# Altium PCB Pulser Driver.PcbDoc (part 1 of 3)
Units mil, origin at the board's own origin, x right, y up, seen from the top; angles counter-clockwise.
Board outline 1200 x 10020 mil, 6 copper layers (TopLayer, Ground, MidLayer1, MidLayer2, Power, BottomLayer); 260 components, 152 nets, 836 pads, 245 vias.
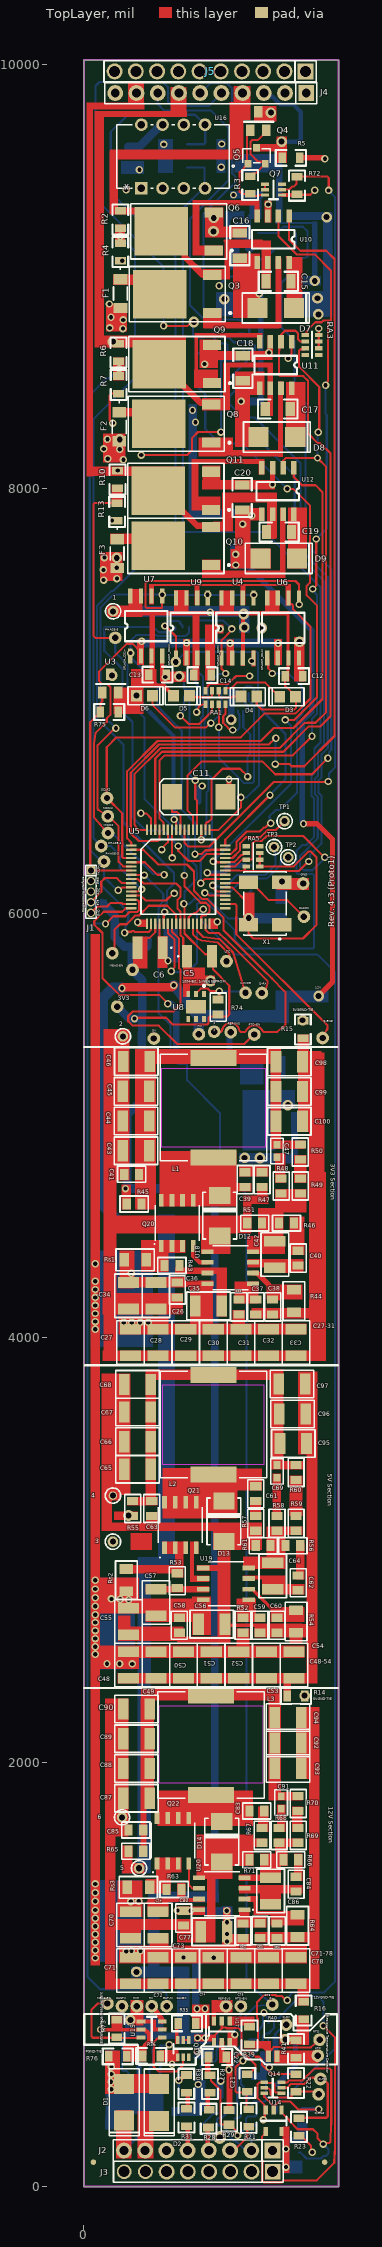
[diagram p0: TopLayer view]
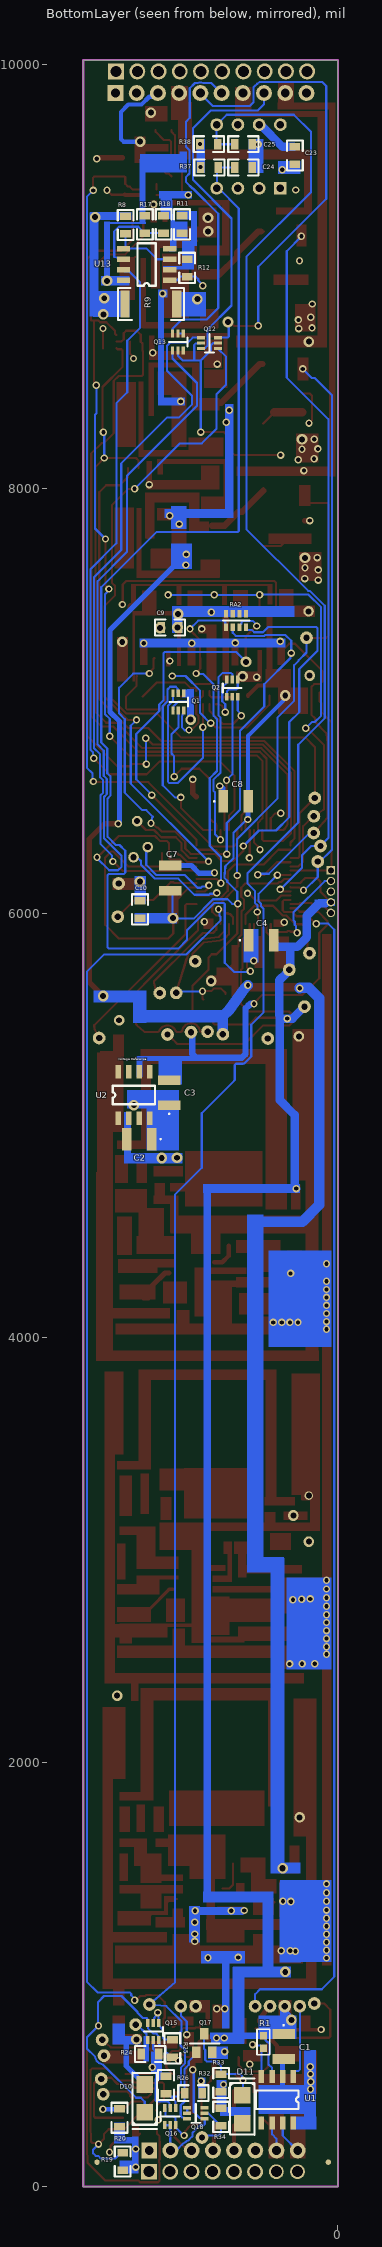
[diagram p1: BottomLayer view, seen from below]
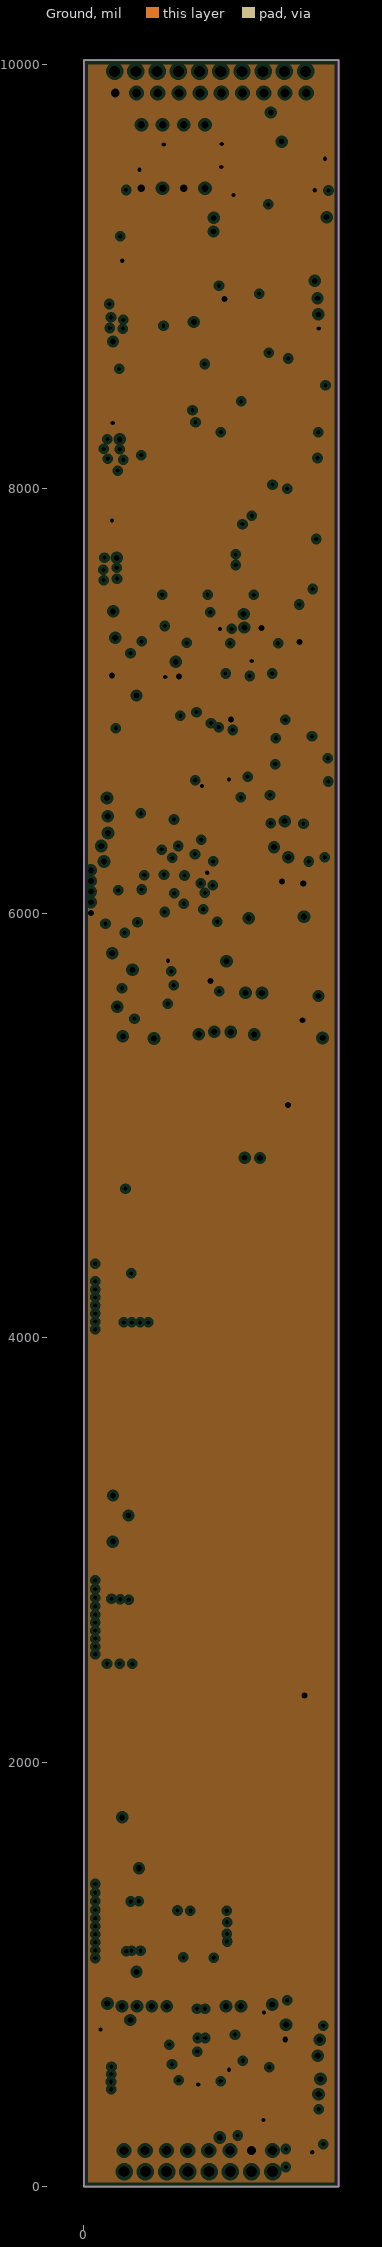
[diagram p2: Ground, clearances drawn from the general rule]
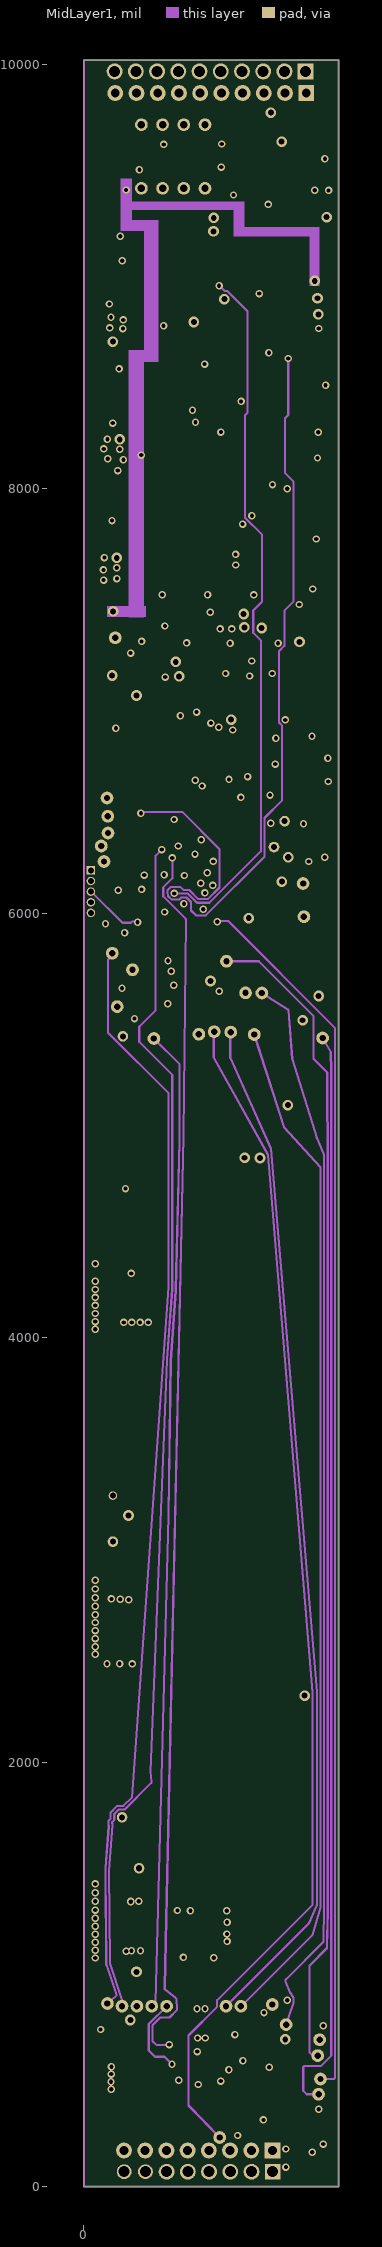
[diagram p3: MidLayer1]
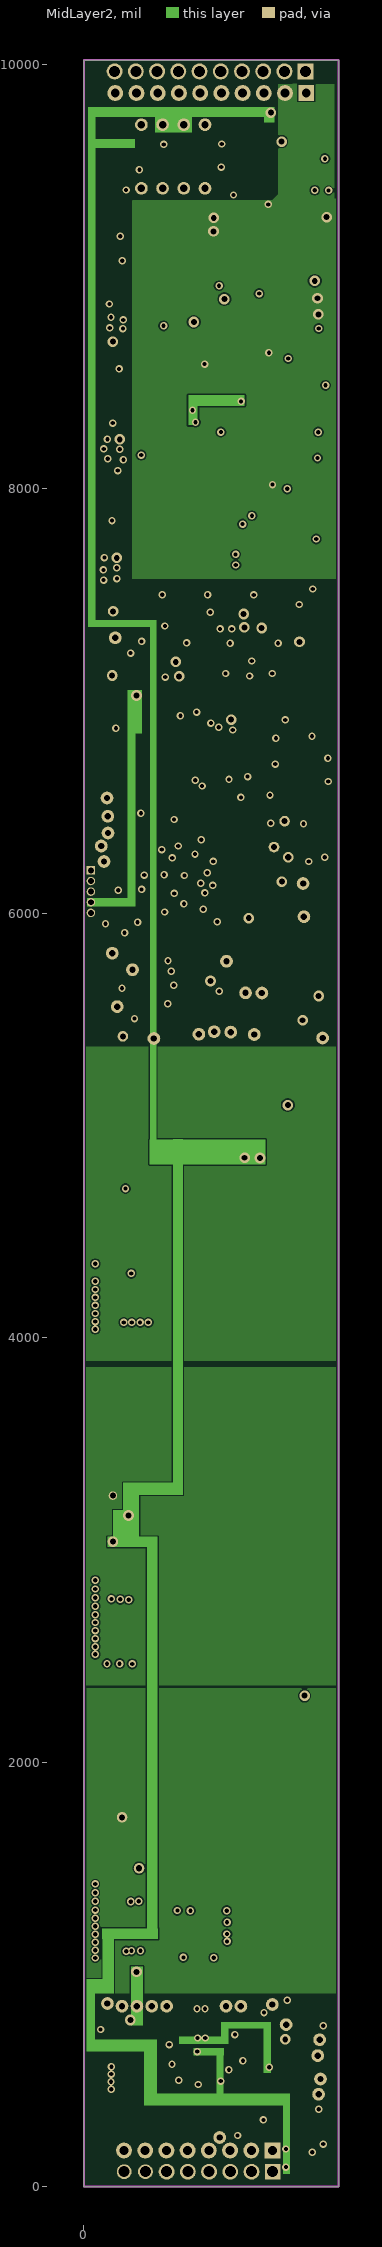
[diagram p4: MidLayer2]
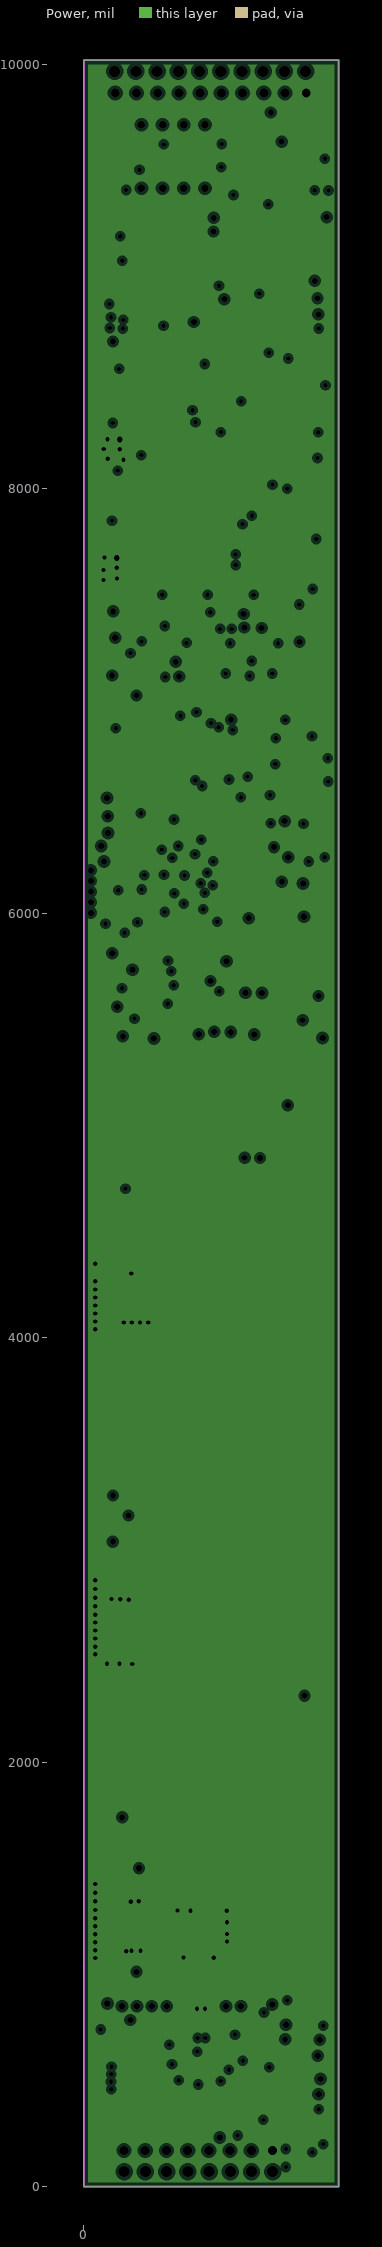
[diagram p5: Power, clearances drawn from the general rule]

## Layer stack, top to bottom
TopSolder: solder mask 0.4, Solder Resist, Dk 3.5
TopLayer: signal copper 1.4
Dielectric1: core 12.6, FR-4, Dk 4.8
Ground: plane copper 1.4, net GND
Dielectric5: prepreg 12.6, FR-4, Dk 4.8
MidLayer1: signal copper 1.4
Dielectric2: core 12.6, FR-4, Dk 4.8
MidLayer2: signal copper 1.4
Dielectric3: prepreg 12.6, FR-4, Dk 4.8
Power: plane copper 1.4, net HV
Dielectric4: core 12.6, FR-4, Dk 4.8
BottomLayer: signal copper 1.4
BottomSolder: solder mask 0.4, Solder Resist, Dk 3.5

## Board outline
0,0 1200,0 1200,10020 0,10020

## Design rules (kind name [scope] priority, off if disabled: settings)
Clearance "Mid2 Layer Clearance" [InNamedPolygon('Mid2 - Blank')] p1: gap=8 ignorepadtopadclearanceinfootprint=FALSE except(0: Arc-Hole Track-Hole SMDPad-Hole THPad-Hole Via-Hole Fill-Hole Poly-Hole Region-Hole Text-Hole)
Clearance "Mid 1 Layer Clearance" [InNamedPolygon('Mid1 - Blank')] p2: gap=8 ignorepadtopadclearanceinfootprint=FALSE except(0: Arc-Hole Track-Hole SMDPad-Hole THPad-Hole Via-Hole Fill-Hole Poly-Hole Region-Hole Text-Hole)
Clearance [All] p3: gap=7 ignorepadtopadclearanceinfootprint=FALSE except(0: Arc-Hole Track-Hole SMDPad-Hole THPad-Hole Via-Hole Fill-Hole Poly-Hole Region-Hole Text-Hole)
FabricationTestPointUsage TestPointUsage [All] p1: valid=0 allowmultiple=FALSE
FabricationTestpoint Testpoint [All] p1: side=3 testpointundercomponent=TRUE minsize=40 maxsize=100 preferedsize=60 minholesize=20 maxholesize=40 preferedholesize=32 testpointgrid=1 allowsidetop=TRUE allowsidebottom=TRUE usegrid=TRUE gridtolerance=0.01
MinimumAnnularRing [All] p1: minimumring=5
MinimumSolderMaskSliver [IsVia] p1: minsoldermaskwidth=5
PlaneClearance [All] p1: clearance=15
PlaneConnect [All] p1: planeconnectstyle=Direct reliefexpansion=20 reliefentries=4 reliefconductorwidth=10 reliefairgap=10
PolygonConnect [All] p1: connectstyle=Direct reliefconductorwidth=10 reliefentries=4 polygonreliefangle="90 Angle" airgapwidth=10
RoutingLayers [All] p1: top layer_v5=TRUE mid layer 1_v5=FALSE mid layer 2_v5=FALSE bottom layer_v5=TRUE
RoutingVias [All] p1: holewidth=20 width=35 viastyle="Through Hole" minholewidth=20 minwidth=35 maxholewidth=28 maxwidth=50
SilkToSolderMaskClearance SilkscreenOverComponentPads [IsPad] p1: minsilkscreentomaskgap=10 clearancetoexposedcopper=TRUE
SolderMaskExpansion [All] p1: expansion=4 istentingtop=FALSE
Width [All] p1: maxlimit=100 minlimit=7 preferedwidth=10
23 further rules are at their usual default settings.

## Classes and differential pairs
component class "U_Power Supply 5V": 3 4 C48 C49 C50 C51 C52 C53 C54 C55 C56 C57 C58 C59 C60 C61 C62 C63 C64 C65 C66 C67 C68 C69 C95 C96 C97 D13 L2 Q21 R52 R53 R54 R55 R56 R57 R58 R59 R60 R61 Rs2 U19
component class "U_Power Supply 3.3V": 1 2 C26 C27 C28 C29 C30 C31 C32 C33 C34 C35 C36 C37 C38 C39 C40 C41 C42 C43 C44 C45 C46 C47 C98 C99 C100 D12 L1 Q20 R14 R15 R16 R42 R43 R44 R45 R46 R47 R48 R49 R50 R51 R76 Rs1 U18
component class "U_Power Supply 12V": 5 6 C70 C71 C72 C73 C74 C75 C76 C77 C78 C79 C80 C81 C82 C83 C84 C85 C86 C87 C88 C89 C90 C91 C92 C93 C94 D14 L3 Q22 R62 R63 R64 R65 R66 R67 R68 R69 R70 R71 Rs3 U20

## Components (designator, comment, footprint, x,y, rotation, side; value= is the part's Value field where it differs from the comment)
1 "5VOUT" TP-S#1 138,7423 r90 top
2 "3V3GND" TP-S#1 184,5420 r90 top
3 "5VOUT" TP-S#1 137,3039 r90 top
4 "5VGND" TP-S#2 137,3256 r90 top
5 "12VOUT" TP-S#1 260,1500 r90 top
6 "12GND" TP-S#1 180,1740 r90 top
C1 "C1210_0.1uF_100V_210C" C1210 256,660 r270 bottom
C2 "C1210_0.1uF_100V_210C" C1210 936.06,4936 r0 bottom
C3 "C1210_0.1uF_100V_210C" C1210 795,5155 r90 bottom
C4 "C1210_0.1uF_100V_210C" C1210 361,5873 r180 bottom
C5 "C1210_0.1uF_100V_210C" C1210 545,5797 r0 top
C6 "C1210_0.1uF_100V_210C" C1210 312,5838 r180 top
C7 "C1210_0.1uF_100V_210C" C1210 789,6165.94 r270 bottom
C8 "C1210_0.1uF_100V_210C" C1210 482,6527 r180 bottom
C9 "0.1uF/50V" 0805-CR#1 833,7346 r180 bottom
C10 "0.1uF/50V" 0805-CR#1 933,6060 r270 bottom
C11 "T2917 100uF/16V +200C" 7343-TANT 416,6549 r0 top
C12 "0.1uF/50V" 0805-CR#1 1031,7117 r180 top
C13 "0.1uF/50V" 0805-CR#1 389,7124 r180 top
C14 "0.1uF/50V" 0805-CR#1 601,7122 r180 top
C15 "1uF/50V" 1206-CR 858,8978 r0 top
C16 "1uF/50V" 1206-CR 735,9205.11 r270 top
C17 "1uF/50V" 1206-CR 854.89,8376 r0 top
C18 "1uF/50V" 1206-CR 749,8627.11 r270 top
C19 "1uF/50V" 1206-CR 860.89,7796 r0 top
C20 "1uF/50V" 1206-CR 746,8018 r270 top
C21 "1uF/50V" 0805-CR#1 770,530 r270 top
C22 "0.1uF/50V" 0805-CR#1 587.32,610 r0 top
C23 "0.1uF/50V" 0805-CR#1 203,9529.32 r90 bottom
C24 "10nF/50V" 0805-CR#1 404.32,9514 r0 bottom
C25 "10nF/50V" 0805-CR#1 404.32,9624 r0 bottom
C26 "GCM32EL8EH106KA07K" 1210 339.99,4135.27 r90 top value="10uF 1210 50V 150C"
C27 "GCM32EL8EH106KA07K" 1210 219.99,3915.27 r90 top value="10uF 1210 50V 150C"
C28 "GCM32EL8EH106KA07K" 1210 349.99,3915.27 r90 top value="10uF 1210 50V 150C"
C29 "GCM32EL8EH106KA07K" 1210 479.99,3915.27 r90 top value="10uF 1210 50V 150C"
C30 "GCM32EL8EH106KA07K" 1210 609.99,3915.27 r90 top value="10uF 1210 50V 150C"
C31 "GCM32EL8EH106KA07K" 1210 739.99,3915.27 r90 top value="10uF 1210 50V 150C"
C32 "GCM32EL8EH106KA07K" 1210 869.99,3915.27 r90 top value="10uF 1210 50V 150C"
C33 "GCM32EL8EH106KA07K" 1210 999.99,3915.27 r90 top value="10uF 1210 50V 150C"
C34 "C1206H104J3GACTU" 1210 209.99,4135.27 r90 top value="2.2uF 1210 175C"
C35 "C1206H104J3GACTU" 1210 525.27,4150.01 r0 top value="470pF 50V 0805 200C"
C36 "0805D121J251KHT" 0805 440,4260 r270 top value="0.1uF 50V 1210 200C"
C37 "C0805H471J1GACTU" 0805 810,4110 r90 top value=CC_0805_470p_200°C
C38 "C0805C272K5HACTU" 0805 890,4110 r90 top value="2.2uF 0805"
C39 "C0805H680J3GACTU" 0805 760,4780 r270 top value=R0805_68pF_25V_200C
C40 "C0805H472J1GACT500" 0805 1010,4410 r270 top value=CC_0805_4700p_200°C
C41 "0805D121J251KHT" 0805 260,4770 r180 top value=100u
C42 "C1206H104J3GACTU" 1210 900.01,4454.73 r270 top value=CC_0805_33pF_200C
C43 "GCM32EL8EH106KA07K" 1210 184,4881 r0 top value="10uF 1210 50V 150C"
C44 "GCM32EL8EH106KA07K" 1210 184,5021 r0 top value="10uF 1210 50V 150C"
C45 "GCM32EL8EH106KA07K" 1210 184,5161 r0 top value="10uF 1210 50V 150C"
C46 "GCM32EL8EH106KA07K" 1210 185,5302 r0 top value="10uF 1210 50V 150C"
C47 "C1206H104J3GACTU" 0603 910,4910 r270 top value=CC_0603_2700pF_200°C
C48 "GCM32EL8EH106KA07K" 1210 209.99,2395.27 r90 top value="10uF 1210 50V 150C"
C49 "GCM32EL8EH106KA07K" 1210 339.99,2395.27 r90 top value="10uF 1210 50V 150C"
C50 "GCM32EL8EH106KA07K" 1210 469.99,2395.27 r90 top value="10uF 1210 50V 150C"
C51 "GCM32EL8EH106KA07K" 1210 599.99,2395.27 r90 top value="10uF 1210 50V 150C"
C52 "GCM32EL8EH106KA07K" 1210 729.99,2395.27 r90 top value="10uF 1210 50V 150C"
C53 "GCM32EL8EH106KA07K" 1210 859.99,2395.27 r90 top value="10uF 1210 50V 150C"
C54 "GCM32EL8EH106KA07K" 1210 989.99,2395.27 r90 top value="10uF 1210 50V 150C"
C55 "GCM32EL8EH106KA07K" 1210 210,2600 r90 top value="10uF 1210 50V 150C"
C56 "C1206H104J3GACTU" 1210 664.73,2649.99 r180 top value="2.2uF 1210 175C"
C57 "C1206H104J3GACTU" 1210 340,2690 r90 top value="470pF 50V 0805 200C"
C58 "0805D121J251KHT" 0805 450,2680 r270 top value="0.1uF 50V 1210 200C"
C59 "C0805H471J1GACTU" 0805 830,2610 r90 top value=CC_0805_470p_200°C
C60 "C0805C272K5HACTU" 0805 910,2610 r90 top value="0.47uF 0805"
C61 "C0805H680J3GACTU" 0805 810,3230 r90 top value=R0805_68pF_25V_200C
C62 "C0805H472J1GACT500" 0805 1010,2880 r270 top value=CC_0805_4700p_200°C
C63 "0805D121J251KHT" 0805 320,3230 r270 top value=100u
C64 "C1206H104J3GACTU" 1210 890,2940 r270 top value=CC_0805_33pF_200C
C65 "GCM32EL8EH106KA07K" 1210 190,3380 r0 top value="10uF 1210 50V 150C"
C66 "GCM32EL8EH106KA07K" 1210 190,3510 r0 top value="10uF 1210 50V 150C"
C67 "GCM32EL8EH106KA07K" 1210 190,3650 r0 top value="10uF 1210 50V 150C"
C68 "GCM32EL8EH106KA07K" 1210 190,3780 r0 top value="10uF 1210 50V 150C"
C69 "C1206H104J3GACTU" 0603 910,3400 r270 top value=CC_0603_2700pF_200°C
C70 "GCM32EL8EH106KA07K" 1210 220,1170 r90 top value="10uF 1210 50V 150C"
C71 "GCM32EL8EH106KA07K" 1210 219.99,955.27 r90 top value="10uF 1210 50V 150C"
C72 "GCM32EL8EH106KA07K" 1210 349.99,955.27 r90 top value="10uF 1210 50V 150C"
C73 "GCM32EL8EH106KA07K" 1210 479.99,955.27 r90 top value="10uF 1210 50V 150C"
C74 "GCM32EL8EH106KA07K" 1210 609.99,955.27 r90 top value="10uF 1210 50V 150C"
C75 "GCM32EL8EH106KA07K" 1210 739.99,955.27 r90 top value="10uF 1210 50V 150C"
C76 "GCM32EL8EH106KA07K" 1210 869.99,955.27 r90 top value="10uF 1210 50V 150C"
C77 "GCM32EL8EH106KA07K" 1210 550.27,1201.01 r0 top value="10uF 1210 50V 150C"
C78 "C1206H104J3GACTU" 1210 999.99,955.27 r90 top value="2.2uF 1210 175C"
C79 "C1206H104J3GACTU" 1210 350,1170 r90 top value="470pF 50V 0805 200C"
C80 "0805D121J251KHT" 0805 470,1300 r270 top value="0.1uF 50V 1210 200C"
C81 "C0805H471J1GACTU" 0805 831,1171 r90 top value=CC_0805_470p_200°C
C82 "C0805C272K5HACTU" 0805 911,1170 r90 top value="0.47uF 0805"
C83 "C0805H680J3GACTU" 0805 850,1770 r180 top value=R0805_68pF_25V_200C
C84 "C0805H472J1GACT500" 0805 1000,1460 r270 top value=CC_0805_4700p_200°C
C85 "0805D121J251KHT" 0805 280,1680 r180 top value=100u
C86 "C1206H104J3GACTU" 1210 880.01,1454.73 r270 top value=CC_0805_33pF_200C
C87 "GCM32EL8EH106KA07K" 1210 185.27,1830.01 r0 top value="10uF 1210 50V 150C"
C88 "GCM32EL8EH106KA07K" 1210 185.27,1970.01 r0 top value="10uF 1210 50V 150C"
C89 "GCM32EL8EH106KA07K" 1210 185.27,2110.01 r0 top value="10uF 1210 50V 150C"
C90 "GCM32EL8EH106KA07K" 1210 185.27,2250.01 r0 top value="10uF 1210 50V 150C"
C91 "C1206H104J3GACTU" 0603 930,1840 r270 top
C92 "GCM32EL8EH106KA07K" 1210 1024.73,2089.99 r180 top value="10uF 1210 50V 150C"
C93 "GCM32EL8EH106KA07K" 1210 1024.73,1969.99 r180 top value="10uF 1210 50V 150C"
C94 "GCM32EL8EH106KA07K" 1210 1024.73,2209.99 r180 top value="10uF 1210 50V 150C"
C95 "GCM32EL8EH106KA07K" 1210 1049,3501 r180 top value="10uF 1210 50V 150C"
C96 "GCM32EL8EH106KA07K" 1210 1045,3640 r180 top value="10uF 1210 50V 150C"
C97 "GCM32EL8EH106KA07K" 1210 1043,3782 r180 top value="10uF 1210 50V 150C"
C98 "GCM32EL8EH106KA07K" 1210 1030,5300 r180 top value="10uF 1210 50V 150C"
C99 "GCM32EL8EH106KA07K" 1210 1030,5160 r180 top value="10uF 1210 50V 150C"
C100 "GCM32EL8EH106KA07K" 1210 1030,5020 r180 top value="10uF 1210 50V 150C"
D1 "MURS120-13-F" SMB-D 190,484 r270 top
D2 "MURS120-13-F" SMB-D 355,483 r270 top
D3 "LTST-C170KGKT" 0805-D 997.8,7020 r180 top
D4 "LTST-C170KGKT" 0805-D 814.8,7021 r180 top
D5 "LTST-C170KGKT" 0805-D 423.2,7025 r0 top
D6 "LTST-C170KGKT" 0805-D 248.2,7025 r0 top
D7 "MURS120-13-F" SMB-D 818,8852 r0 top
D8 "MURS120-13-F" SMB-D 823,8244 r0 top
D9 "MURS120-13-F" SMB-D 831.77,7672 r0 top
D10 "SMAZ5V6" SMA 967.48,506.3 r270 bottom
D11 "DNP" SMA 392.52,273.7 r90 bottom
D12 "STPS2H100UY" SMB 640,4480 r270 top value=100V-2A
D13 "STPS2H100UY" SMB 660,3040 r270 top value=100V-2A
D14 "STPS2H100UY" SMB 650,1530 r270 top value=100V-2A
F1 "SF-1206HH3000R-2" SF1206HH3000R2#1 172,8920 r270 top
F2 "SF-1206HH3000R-2" SF1206HH3000R2#2 167,8292 r270 top
F3 "SF-1206HH3000R-2" SF1206HH3000R2#2 157,7695 r270 top
J1 "ICSP" "HDR1x5 - 0.050\"" 33,6202 r270 top
J2 "Interface" HDR1X8#1 889,170 r180 top
J3 "Strain Relief" HDR1X8#2 890,70 r180 top
J4 "Motor" HDR1X10#1 1048,9865 r180 top
J5 "Strain Relief" HDR1X10#2 1045,9967 r180 top
L1 "DRA125-470-R" IND_CB_DRA125 610,5083.75 r90 top value=33u-2.59A
L2 "DRA125-470-R" IND_CB_DRA125 610,3590 r90 top value=33u-2.59A
L3 "DRA125-470-R" IND_CB_DRA125 600,2080 r90 top value=33u-2.59A
Q1 "2N7002DW" DCK-6 725.82,7036.71 r270 bottom
Q2 "2N7002DW" DCK-6 523.05,7020.29 r90 bottom
Q3 "IPD90N06S4L03ATMA2" TO228P998X235-3N-2-V 481.02,8918 r180 top
Q4 "ZXMP6A13F" DGS 784,9690 r0 top
Q5 "ZXMP6A13F" SOT-23_DIO 814,9570 r0 top
Q6 "IPD90N06S4L03ATMA2" TO228P998X235-3N-2-V 487.98,9212.76 r180 top
Q7 "2N7002DW" DCK-6 934.71,9384.41 r180 top
Q8 "IPD90N06S4L03ATMA2" TO228P998X235-3N-2-V 477.02,8307 r180 top
Q9 "IPD90N06S4L03ATMA2" TO228P998X235-3N-2-V 480,8588 r180 top
Q10 "IPD90N06S4L03ATMA2" TO228P998X235-3N-2-V 474.98,7730.76 r180 top
Q11 "IPD90N06S4L03ATMA2" TO228P998X235-3N-2-V 474.98,7990.76 r180 top
Q12 "2N7002DW" DCK-6 565.29,8661.41 r0 bottom
Q13 "2N7002DW" DCK-6 728,8731.71 r270 bottom
Q14 "2N7002DW" DCK-6 930.71,440 r180 top
Q15 "2N7002DW" DCK-6 844.41,770.71 r270 bottom
Q16 "2N7002DW" DCK-6 815.59,289.29 r90 bottom
Q17 "ZXMP6A13F" DGS 667.4,633.39 r180 bottom
Q18 "2N7002DW" DCK-6 629.29,320 r0 bottom
Q19 "2N7002DW" DCK-6 442.41,609.29 r90 top
Q20 "NDS9407" SOIC_S9407_ONS 440,4540 r270 top value=60V-3A
Q21 "NDS9407" SOIC_S9407_ONS 455,3117.25 r270 top value=60V-3A
Q22 "NDS9407" SOIC_S9407_ONS 420,1630 r270 top value=60V-3A
R1 "3K32" 0603 351,651 r90 bottom
R2 "10K" 0805-CR#1 172,9309.68 r270 top
R3 "100K" 0805-CR#1 784,9390 r90 top
R4 "1K" 0805-CR#1 172,9074.32 r90 top
R5 "100K" 0805-CR#1 934,9560 r0 top
R6 "10K" 0805-CR#1 163,8684 r270 top
R7 "1K" 0805-CR#1 164,8449 r90 top
R8 "1K" 0805-CR#1 1000,9284.68 r270 bottom
R9 "0R1 (1W)" 2512-CR 759,8871 r0 bottom
R10 "10K" 0805-CR#1 158,8085.68 r270 top
R11 "10K" 0805-CR#1 735,9205 r90 bottom
R12 "100K" 0805-CR#1 710,9082.68 r270 bottom
R13 "1K" 0805-CR#1 157,7850.32 r90 top
R14 "R0805 0R" 0805-CR#1 957.32,2312 r0 top
R15 "R0805 0R" 0805-CR#1 1032,5411 r90 top
R16 "R0805 0R" 0805-CR#1 1036,870.68 r270 top
R17 "100K" 0805-CR#1 910,9205 r90 bottom
R18 "10K" 0805-CR#1 821,9205 r90 bottom
R19 "10K" 0805-CR#1 1013.87,77.32 r90 bottom
R20 "10K" 0805-CR#2 1029,283 r90 bottom
R21 "1K" 0805-CR#1 777,365 r270 top
R22 "10K" 0805-CR#1 1000,530 r270 top
R23 "10K" 0805-CR#1 1014,323 r270 top
R24 "100K" 0805-CR#1 925.68,625 r180 bottom
R25 "10K" 0805-CR#1 780,610 r90 bottom
R26 "10K" 0805-CR#1 810,520 r270 bottom
R27 "1K" 0805-CR#1 595,525 r270 top
R28 "1K" 0805-CR#3 591,361.68 r270 top
R29 "R0805-5k-225C" 0805 685,291 r90 top
R30 "1K" 0805-CR#1 483,525.68 r270 top
R31 "1K" 0805-CR#1 484,366.68 r270 top
R32 "10K" 0805-CR#1 640,440 r0 bottom
R33 "10K" 0805-CR#1 550,530 r270 bottom
R34 "10K" 0805-CR#1 550,287.32 r90 bottom
R35 "10K" 0805-CR#4 526.68,769 r180 top
R36 "1K" 0805-CR#1 276.32,616 r0 top
R37 "62K" 0805-CR#1 564.32,9514 r0 bottom
R38 "62K" 0805-CR#1 567,9624 r0 bottom
R39 "1K" 0805-CR#1 780,670 r90 top
R40 "RTD (1K)" F2020 850,780 r0 top
R41 "1K 0.05% 5 ppm" 0805-CR#1 1000,607.32 r90 top
R42 "PATT0805E1003BGT1" 0805 730,4180 r270 top value="R0805 100K 250C"
R43 "ERJ-PB6B6812V" 0805 450,4340 r180 top value=R0805_1K_230C
R44 "R1206_1MOhm_0.1%_250°C" 1206 990,4120 r90 top
R45 "RS73F2ATTD1501B" 0805 272,4630 r180 top value=1R
R46 "PATT0805E1003BGT1" 0805 920,4540 r0 top value="R0805 100K 250°C"
R47 "ERJ-PB6B1004V" 0805 840,4710 r90 top value=25.5
R48 "ERJ-PB6B6812V" 0805 930,4750 r270 top value=475R
R49 "PATT0603E49R9BGT1" 0805 1020,4680 r90 top value=49.9K
R50 "PATT0805E1003BGT1" 0805 1020,4910 r270 top value="R0805 100K 250C"
R51 "RNCP0805FTD1R00" 0805 770,4540 r0 top value=26.7K
R52 "PATT0805E1003BGT1" 0805 750,2680 r270 top value="R0805 100K 250C"
R53 "ERJ-PB6B6812V" 0805 440,2820 r90 top value=R0805_1K_230C
R54 "R1206_1MOhm_0.1%_250°C" 1206 1000,2610 r90 top
R55 "RS73F2ATTD1501B" 0805 230,3230 r270 top value=1R
R56 "PATT0805E1003BGT1" 0805 950,3020 r0 top value="R0805 100K 250°C"
R57 "ERJ-PB6B1004V" 0805 810,3090 r90 top value=25.5
R58 "ERJ-PB6B6812V" 0805 910,3160 r270 top value=475R
R59 "PATT0603E49R9BGT1" 0805 1000,3090 r90 top value=0R0
R60 "PATT0805E1003BGT1" 0805 1000,3400 r270 top value=22.6k
R61 "RNCP0805FTD1R00" 0805 810,3020 r0 top value=3.57K
R62 "PATT0805E1003BGT1" 0805 750,1240 r270 top value="R0805 100K 250C"
R63 "ERJ-PB6B6812V" 0805 460,1400 r180 top value=R0805_1K_230C
R64 "R1206_1MOhm_0.1%_250°C" 1206 1007,1176 r90 top
R65 "RS73F2ATTD1501B" 0805 280,1580 r180 top value=1R
R66 "PATT0805E1003BGT1" 0805 940,1540 r0 top value="R0805 100K 250°C"
R67 "ERJ-PB6B1004V" 0805 840,1620 r90 top value=25.5
R68 "ERJ-PB6B6812V" 0805 920,1690 r270 top
R69 "PATT0603E49R9BGT1" 0805 1010,1620 r90 top value=0R0
R70 "PATT0805E1003BGT1" 0805 1010,1840 r270 top value=124k
R71 "RNCP0805FTD1R00" 0805 780,1540 r0 top value=7.5k
R72 "10K" 0805-CR#1 1004,9470 r270 top
R73 "10K" 0805-CR#1 155,703.32 r90 top
R74 "ERJ-PB6B6812V" 0805 633.09,5593.08 r270 top value=R0805_1K_230C
R75 "10K" 0805-CR#1 161,6949 r180 top
R76 "R0805 0R" 0805-CR#1 118.32,614 r0 top
RA1 "1K" 742x083 573.01,7047.99 r0 top
RA2 "10K" 742x083 527,7410.99 r180 bottom
RA3 "10K" 742x083 1044,8631.01 r90 top
RA5 "10K" 742x083 829,6315.5 r270 top
Rs1 "ERJ-8CWFR020V" 1206 295,4367 r180 top value=0.02R
Rs2 "ERJ-8CWFR020V" 1206 200,2910 r270 top value=0.02R
Rs3 "ERJ-8CWFR020V" 1206 310,1410 r180 top value=0.02R
TP1 "TP1" TP-S#1 946,6434 r90 top
TP2 "TP2" TP-S#1 963,6264 r0 top
TP3 "TP3" TP-S#1 896,6312 r0 top
U1 "SN65HVD233HD" D8 210,519 r270 bottom
U2 "ADR423" D8 1036,5034 r90 bottom
U3 "MCP130" DGS 86.6,7040.39 r0 top
U4 "S25FL128LAGMFM010" SO8W 649,7203 r90 top
U5 "dsPIC33FJ128MC706A" "QFP10X10-64 (MICROCHIP)" 223.31,6319.17 r0 top
U6 "S25FL128LAGMFM010" SO8W 864,7203 r90 top
U7 "S25FL128LAGMFM010" SO8W 219,7212 r90 top
U8 "DS2431Q+" TDFN-6 529.09,5619.13 r270 top
U9 "S25FL128LAGMFM010" SO8W 434,7203 r90 top
U10 "IR2183S" D8 967,9286 r270 top
U11 "IR2183S" D8 979,8693 r270 top
U12 "IR2183S" D8 989,8099 r270 top
U13 "OP296" D8 792,8982 r0 bottom
U14 "SN74LVC1G126" DBV-5 932,360 r270 top
U15 "SN74LVC1T45" DBV-6 270,777.4 r0 top
U16 "ADXL206" D_8_1_ADI 271,9416 r90 top
U17 "SN74LVC1T45" DBV-6 612.6,680 r90 top
U18 "TPS40200SHKJ" SOIC_S9407_ONS 690,4330 r0 top
U19 "TPS40200SHKJ" SOIC_S9407_ONS 670,2840 r0 top
U20 "TPS40200SHKJ" SOIC_S9407_ONS 650,1380 r0 top
X1 "ECS-3953C-200-AU" ECS-3951C 933,5946 r270 top

## Footprints (in the part's own frame and the unit in brackets; to place one, negate y for a bottom-side part, rotate by r counter-clockwise, add the part's x,y. Pads: shape width x height; smd on the part's side, far side on the other; paste and mask are expansions set on the pad)
0603 [mil]
  rect 36x32 smd: 1(0,0) 2(60,0)
  silkscreen extent -31,-30 90,30
742x083 [mm] "742x083 4-Isolated Resistor Array"
  rect 0.5x0.9 smd: 1(0,0) 2(0,-1.6) 3(0.8,0) 4(0.8,-1.6) 5(1.6,0) 6(1.6,-1.6) 7(2.4,0) 8(2.4,-1.6)
  silkscreen extent -0.4,-0.8 2.8,-0.8
0805 [mil]
  rect 38.5x52 smd: 1(0,0) 2(70,0)
  silkscreen extent -31,-38 101,38
0805-CR#1 [mm]
  rect 0.9x1.3 smd: 1(0,0) 2(2.1,0)
  silkscreen extent -0.75,-0.95 2.85,0.95
0805-CR#2 [mm]
  rect 0.9x1.3 smd: 1(0,0) ""(2.1,0)
  silkscreen extent -0.75,-0.95 2.85,0.95
0805-CR#3 [mm]
  rect 0.9x1.3 smd: 1(0,0) 2(2.117,-0.076)
  silkscreen extent -0.73,-1.03 2.87,0.87
0805-CR#4 [mm]
  rect 0.9x1.3 smd: 2(2.1,0) ""(0,0)
  silkscreen extent -0.75,-0.95 2.85,0.95
0805-D [mm]
  rect 1.3x1.4 smd: 1(0,0) 2(1.9,0)
  silkscreen extent -1.02,-1.07 3.17,1.07
1206 [mil]
  rect 45x65 smd: 1(0,0) 2(105,0)
  silkscreen extent -37,-51 144,51
1206-CR [mm]
  rect 1.1x1.7 smd: 1(0,0) 2(3,0)
  silkscreen extent -0.86,-1.14 3.85,1.14
1210 [mil]
  rect 50x100 smd: 1(-0.27,-0.01) 2(124.73,-0.01)
  silkscreen extent -40,-65 165,65
2512-CR [mm]
  rect 1.1x3.2 smd: 1(0,0) 2(6.2,0)
  silkscreen extent -0.85,-1.9 7.05,1.9
7343-TANT [mm]
  rect 2.4x3 smd: 1(0,0) 2(6.4,0)
  silkscreen extent -1.5,-2.15 7.9,2.15
C1210 [mm]
  rect 1.15x2.7 smd: 1(-1.5,0) 2(1.5,0)
  silkscreen extent -2.6,-0.05 -2.5,0.05, body extent -1.7,-1.35 1.7,1.35, height 1.9
D8 [mil]
  rect 62x26 smd: 1(0,0) 2(0,-50) 3(0,-100) 4(0,-150) 5(219,-150) 6(219,-100) 7(219,-50) 8(219,0)
  silkscreen extent 66,-175 153,25
D_8_1_ADI [mil]
  rect 60x60 / inner round 60 / far side rect 60x60 hole 35 paste-30 mask+0: 1(0,0)
  round 60 hole 35 paste-30 mask-30: 2(0,-100) 3(0,-200) 4(0,-300) 5(300,-300) 6(300,-200) 7(300,-100) 8(300,0)
  silkscreen extent 0,-415 300,115, body extent -5,-410 315,110, height 113
DBV-5 [mm] "SOT-23-5 Footprint for TI devices"
  rect 1.075x0.5 smd: 1(0,0) 2(0,-0.95) 3(0,-1.9) 4(2.525,-1.9) 5(2.525,0)
  silkscreen extent 0.74,-2.48 1.8,0.58
DBV-6 [mm] "SOT-23-6 Footprint for TI devices"
  rect 1.075x0.5 smd: 1(0,0) 2(0,-0.95) 3(0,-1.9) 4(2.525,-1.9) 5(2.525,-0.95) 6(2.525,0)
  silkscreen extent 0.74,-2.48 1.8,0.58
DCK-6 [mm] "SC-70-6 Footprint for TI devices"
  rect 0.95x0.4 smd: 1(0,0) 2(0,-0.65) 3(0,-1.3) 4(2.05,-1.3) 5(2.05,-0.65) 6(2.05,0)
  silkscreen extent 0.49,-1.73 1.55,0.5
DGS [mm]
  rect 1x1.4 smd: 1(0,0) 2(1.9,0) 3(0.95,2.2)
  silkscreen extent -0.76,1.02 2.79,1.02
ECS-3951C [mm]
  rect 1.65x2.3 smd: 1(0,0) 2(-5.08,0) 3(-5.08,-4) 4(0,-4)
  silkscreen extent -6.35,-4.57 1.78,0.55
F2020 [mm] "F2020 Resistive Temperature Detector"
  rect 0.6x1.4 smd: 1(0.5,-4.2) 2(1.5,-4.2)
  silkscreen extent 0,-2 2,0
"HDR1x5 - 0.050\"" [mil] "Header Pin Connector - 0.050\" Pitch"
  rect 40x40 hole 28: 1(0,0)
  round 40 hole 28: 2(50,0) 3(100,0) 4(150,0) 5(200,0)
  silkscreen extent -25,-25 225,25
HDR1X8#1 [mil]
  rect 75x75 hole 42: 1(0,0)
  round 75 hole 42: 2(100,0) 3(200,0) 4(300,0) 5(400,0) 6(500,0) 7(600,0) 8(700,0)
  silkscreen extent -50,-50 750,50
HDR1X8#2 [mil]
  rect 75x75 hole 52: 1(0,0)
  round 75 hole 52: 2(100,0) 3(200,0) 4(300,0) 5(400,0) 6(500,0)
  round 70 hole 52: 7(600,0) 8(700,0)
  silkscreen extent -50,-50 750,50
HDR1X10#1 [mil]
  rect 75x75 hole 42: 1(0,0)
  round 75 hole 42: 2(100,0) 3(200,0) 4(300,0) 5(400,0) 6(500,0) 7(600,0) 8(700,0) 9(800,0) 10(900,0)
  silkscreen extent -50,-50 950,50
HDR1X10#2 [mil]
  rect 75x75 hole 52: 1(0,0)
  round 75 hole 52: 2(100,0) 3(200,0) 4(300,0) 5(400,0) 6(500,0) 7(600,0) 8(700,0) 9(800,0) 10(900,0)
  silkscreen extent -50,-50 950,50
IND_CB_DRA125 [mil]
  rect 75.5x217 smd paste+0 mask+0: 1(-233.75,0) 2(233.75,0)
  TopLayer keep-out region: -186.75,-244 -186.75,244 185.25,244 185.25,-244
  silkscreen extent -251,-251 251,251, body extent -246,-246 246,246, height 236
"QFP10X10-64 (MICROCHIP)" [mm]
  rect 1.254x0.27 smd: 1(0,0) 2(0,-0.5) 3(0,-1) 4(0,-1.5) 5(0,-2) 6(0,-2.5) 7(0,-3) 8(0,-3.5) 9(0,-4) 10(0,-4.5) 11(0,-5) 12(0,-5.5) 13(0,-6) 14(0,-6.5) 15(0,-7) 16(0,-7.5) 33(11.254,-7.5) 34(11.254,-7) 35(11.254,-6.5) 36(11.254,-6) 37(11.254,-5.5) 38(11.254,-5) 39(11.254,-4.5) 40(11.254,-4) 41(11.254,-3.5) 42(11.254,-3) 43(11.254,-2.5) 44(11.254,-2) 45(11.254,-1.5) 46(11.254,-1) 47(11.254,-0.5) 48(11.254,0)
  rect 0.27x1.254 smd: 17(1.877,-9.377) 18(2.377,-9.377) 19(2.877,-9.377) 20(3.377,-9.377) 21(3.877,-9.377) 22(4.377,-9.377) 23(4.877,-9.377) 24(5.377,-9.377) 25(5.877,-9.377) 26(6.377,-9.377) 27(6.877,-9.377) 28(7.377,-9.377) 29(7.877,-9.377) 30(8.377,-9.377) 31(8.877,-9.377) 32(9.377,-9.377) 49(9.377,1.877) 50(8.877,1.877) 51(8.377,1.877) 52(7.877,1.877) 53(7.377,1.877) 54(6.877,1.877) 55(6.377,1.877) 56(5.877,1.877) 57(5.377,1.877) 58(4.877,1.877) 59(4.377,1.877) 60(3.877,1.877) 61(3.377,1.877) 62(2.877,1.877) 63(2.377,1.877) 64(1.877,1.877)
  silkscreen extent 1.16,-8.21 10.09,0.71
SF1206HH3000R2#1 [mm]
  rect 1.25x1.65 smd: 1(-1.725,0) ""(1.725,0)
  silkscreen extent -3,-0.82 0.8,0.82, body extent -1.6,-0.83 1.6,0.82, height 1
SF1206HH3000R2#2 [mm]
  rect 1.25x1.65 smd: 1(-1.725,0) 2(1.725,0)
  silkscreen extent -3,-0.82 0.8,0.82, body extent -1.6,-0.83 1.6,0.82, height 1
SMA [mm]
  rect 2x2 smd: 1(0.64,1.46) 2(3.97,1.46)
  silkscreen extent -0.76,0 5.97,2.92
SMB [mil]
  rect 80x100 smd: A(0,0) K(-190,0)
  silkscreen extent -205,-80 15,80, body extent -201,-70 12,72, height 90
SMB-D [mm]
  rect 2.4x2.4 smd: 1(0,0) 2(4.4,0)
  silkscreen extent -1.8,-1.8 6.2,1.8
SO8W [mil]
  rect 70x20 smd: 1(0,0) 2(0,-50) 3(0,-100) 4(0,-150) 5(283,-150) 6(283,-100) 7(283,-50) 8(283,0)
  silkscreen extent 70,-175 213,25
SOIC_S9407_ONS [mil]
  rect 57.5x22 smd paste+0 mask+0: 1(107.25,-75) 2(107.25,-25) 3(107.25,25) 4(107.25,75) 5(-107.25,75) 6(-107.25,25) 7(-107.25,-25) 8(-107.25,-75)
  silkscreen extent -84,-104 84,104
SOT-23_DIO [mil]
  rect 32x35 smd paste+0 mask+0: 1(-40.35,-37.2) 2(40.35,-37.2) 3(0,37.2)
  silkscreen extent -115,-54 65,33
TDFN-6 [mm] "Maxim 1-Wire TDFN 6-Pin 3mm x 3mm"
  rect 0.71x0.46 smd: 1(0,0.94) 2(0,0) 3(0,-0.94) 4(3,0.94) 5(3,0) 6(3,-0.94)
  rect 1.6x2.39 smd: 7(1.5,0)
  silkscreen extent -1.1,0.84 -0.9,1.04
TO228P998X235-3N-2-V [mm] "TO,2.28mm pitch;2 pin,9.98mm L X 6.12mm W X 2.35mm H body"
  rect 2.2x1.2 smd paste+0 mask+0: 1(-3.15,2.28) 3(-3.15,-2.28)
  rect 6.4x5.8 smd paste+0 mask+0: 2(3.15,0)
  silkscreen extent -5.43,-3.3 6.8,3.3, body extent -3.94,-3.25 6.04,3.25, height 2.36
TP-S#1 [mm]
  round 1.27 hole 0.725: 1(0,0)
  silkscreen extent -0.91,-0.91 0.91,0.91
TP-S#2 [mm]
  round 1.016 hole 0.711: 1(0,0)
  silkscreen extent -0.91,-0.91 0.91,0.91

## Part data
1 2 3 4 5 6 TP2 TP3: library part TP, "Test  Point", Package="Through hole", Num Connections=1, Number=PMT104887, RoHS=0, Subtype="Test Loop"
C1 C2 C3 C4 C5 C6 C7 C8: library part C1210H104J1GACTU, "Capacitor", Manufacturer_Name=KEMET, Mouser Part Number=80-C1210H104J1GACTU, Operating Temperature Range="-55C to +200C", Datasheet Link=https://content.kemet.com/datasheets/KEM_C1001_C0G_200C_SMD.pdf, Manufacturer_Part_Number=C1210H104J1GACTU, Mouser Price/Stock=https://www.mouser.co.uk/ProductDetail/KEMET/C1210H104J1GACTU?qs=w3%252Bcv6FlocpP4mccX4tnSA%3D%3D
C9 C10 C12 C13 C14 C15 C16 C17 C18 C19 C20 C22 C23 C24 C25: library part Cap, "Capacitor", Manufacturer="Murata Electronics North America", Vendor=Digi-Key
  C9 C10 C12 C13 C14 C22 C23: Manu PN=GRM21BR71H104KA01L, Vendor PN=490-1666-1-ND, Vertex PN=6280000
  C15 C16 C17 C18 C19 C20: Manu PN=GCM31MR71H105KA55L, Vendor PN=490-4795-1-ND, Vertex PN=6221004
  C24 C25: Manu PN=GRM2195C1H103JA01D, Vendor PN=490-1642-1-ND, Vertex PN=6281002
C11: library part "Cap Pol1", "SMT Tantalum Electrolytic Capacitor", Manufacturer=Kemet, Manu PN=T500X107K016BG6110, Vendor=Digi-Key, Vendor PN=399-T500X107K016BG6110TR-ND, Vertex PN=6271006-01
C21: library part Cap, "Capacitor", Manufacturer=TDK, Manu PN=CGA4J1X8L1H105K125AC, Vendor=Digi-Key, Vendor PN=445-CGA4J1X8L1H105K125ACCT-ND, Vertex PN=TBD
C26 C43 C48 C65 C70 C87: library part CC-1210, "CAP CER 0.1UF 50V C0G/NP0 1210 200C", Temp. Coeff.=X8L, Temperature="-55°C ~ 150°C", Tolerance=±10%, Voltage=50V, Class=Epart, Dimension="3.20mm x 1.60mm", Do not load=0, Height=1.6mm, Mfg="Murata Electronics", MfgPN=GCM32EL8EH106KA07K, Package=CC-1210, Unit Price=19.5, Vendor=Digi-Key, VendorPN=490-GCM32EL8EH106KA07KCT-ND
C27 C28 C29 C30 C31 C32 C33 C44 C45 C46 C49 C50 C51 C52 C53 C54 C55 C66 C67 C68 C71 C72 C73 C74 C75 C76 C77 C88 C89 C90 C92 C93 C94 C95 C96 C97 C98 C99 C100: library part CC-1210, "CAP CER 0.1UF 50V C0G/NP0 1210 200C", Temp. Coeff.=X8L, Temperature="-55°C ~ 200°C", Tolerance=±5%, Voltage=50V, Class=Epart, Dimension="3.20mm x 1.60mm", Do not load=0, Height=1.6mm, Mfg="Murata Electronics", MfgPN=GCM32EL8EH106KA07K, Package=CC-1210, Unit Price=19.5, Vendor=Digi-Key, VendorPN=490-GCM32EL8EH106KA07KCT-ND
C34 C36 C56 C58 C78 C80: library part CC-1210, "CAP CER 0.1UF 50V C0G/NP0 1210 200C", Package=CC-1206, Temp. Coeff.="C0G, NP0", Temperature="-55°C ~ 200°C", Tolerance=±5%, Voltage=25V, Class=Epart, Dimension="3.20mm x 1.60mm", Do not load=0, Height=1.6mm, Mfg=KEMET, MfgPN=C1206H104J3GACTU, Unit Price=19.5, Vendor=Digi-Key, VendorPN=399-5750
C35 C57: library part CC-0805-100p-100V-10%-200C-NP0, "CAP CER 470PF 50V C0G/NP0 0805 200C", Package=CC-0805, Temp. Coeff.="C0G, NP0", Temperature="-55°C ~ 200°C", Tolerance=±5%, Voltage=100V, Class=Epart, Dimension="1.60mm x 0.80mm", Do not load=0, Height=1.37mm, Mfg="Vishay Vitramont", MfgPN=VJ0805D471JXAQJHT, Unit Price=0.34, Vendor=Digi-Key, VendorPN=720-VJ0805D471JXAQJHTCT-ND
C37 C59 C81: library part CC-0805-470p-100V-10%-150C-NP0, "CAPACITOR CER 470PF 100V C0G/NP0 0805", Package=CC-0805, Temp. Coeff.="C0G, NP0", Temperature="-55°C ~ 200°C", Tolerance=±10%, Voltage=100V, Class=Epart, Dimension="2.00mm x 1.25mm", Do not load=0, Height=1.25mm, Mfg=KEMET, MfgPN=C0805H471J1GACTU, Unit Price=0.47, Vendor=Digi-Key, VendorPN=720-1262
C38 C60 C82: library part CC-0805-47n-25V-5%-125C-NP0, "CAPACITOR CER 0.047UF 25V C0G/NP0 0805", Package=CC-0805, Temp. Coeff.="C0G, NP0", Temperature="-55°C ~ 125°C", Tolerance=±5%, Voltage=25V, Class=Epart, Dimension="2.00mm x 1.25mm", Do not load=0, Height=1.25mm, Mfg=KEMET, MfgPN=C0805C473J3GACAUTO, Unit Price=0.95, Vendor=Digi-Key, VendorPN=399-6970
C39 C40 C61 C62 C83 C84: library part CC-0805-2200p-100V-5%-200C-NP0, "CAPACITOR CER 2200PF 100V C0G/NP0 0805", Package=CC-0805, Temp. Coeff.="C0G, NP0", Temperature="-55°C ~ 200°C", Tolerance=±5%, Voltage=100V, Class=Epart, Dimension="2.00mm x 1.25mm", Do not load=0, Height=0.9mm, Mfg=KEMET, Supplier 1=Digi-Key, Unit Price=2.65
  C39 C61 C83: MfgPN=C0805H680J3GACTU, Vendor=Mouser, VendorPN=80-C0805H680J3G
  C40 C62 C84: MfgPN=C0805H472J1GACT500, Vendor=Digi-Key, VendorPN=399-9996-2-ND
C41 C63 C85: library part CT-2917-100u-16V-10%-150C, "CAPACITOR TANT 100UF 16V 10% 2917", Package=CT-2917, Temperature="-55°C ~ 150°C", Tolerance=±10%, Voltage=16V, Class=Epart, Dimension="7.30mm x 4.30mm", Do not load=0, Height=4.1mm, Mfg=KEMET, MfgPN=T498X107K016ATE075, Unit Price=6.63, Vendor=Digi-Key, VendorPN=399-5207
C42 C64 C86: library part CC-0805-120p-100V-5%-200C-NP0, "CAPACITOR CER 120PF 250V NP0 0805", Package=CC-0805, Temp. Coeff.="C0G, NP0", Temperature="-55°C ~ 200°C", Tolerance=±5%, Voltage=250V, Class=Epart, Dimension="2.03mm x 1.27mm", Do not load=0, Height=1.37mm, Mfg="Knowles Novacap", MfgPN=0805D121J251KHT, Unit Price=0.25, Vendor=Digi-Key, VendorPN=0805D121J251KHT
C47 C69: library part CC-0805-2700p-50V-10%-150C, "CAPACITOR CER 2700PF 50V X8R 0805", Package=CC-0805, Temp. Coeff.=C0G, Temperature="-55°C ~ 200°C", Tolerance=±5%, Voltage=50V, Class=Epart, Dimension="2.00mm x 1.25mm", Do not load=0, Height=1.25mm, Mfg=KEMET, MfgPN=C0603H272J5GACTU, Unit Price=0.84, Vendor=Digi-Key, VendorPN=399-C0603H272J5GACTUCT-ND
C79: library part CC-0805-100p-100V-10%-200C-NP0, "CAP CER 470PF 50V C0G/NP0 0805 200C", Package=CC-0805, Temp. Coeff.="C0G, NP0", Temperature=VJ0805D471JXAQJHT, Tolerance=±5%, Voltage=100V, Class=Epart, Dimension="1.60mm x 0.80mm", Do not load=0, Height=1.37mm, Mfg="Vishay Vitramont", MfgPN=VJ0805D471JXAQJHT, Unit Price=0.34, Vendor=Digi-Key, VendorPN=720-VJ0805D471JXAQJHTCT-ND
C91: library part CC-0805-2700p-50V-10%-150C, "CAPACITOR CER 2700PF 50V X8R 0805", Package=CC-0805, Class=Epart, Dimension="2.00mm x 1.25mm", Do not load=YES, Height=1.25mm, Unit Price=0.84
D1 D2 D7 D8 D9: library part DIODE_1, "Diode", Manufacturer="Diodes Inc.", Manu PN=MURS120-13-F, Vendor=Digi-Key, Vendor PN=MURS120-FDITR-ND, Vertex PN=6600001-01
D3 D4 D5 D6: library part LED0, "Green Clear SMT 0805 LED", Manufacturer="Lite-On Inc", Manu PN=LTST-C170KGKT, Vendor=Digi-Key, Vendor PN=160-1414-1-ND, Vertex PN=6600006
D10 D11: library part "D Zener", "SMAZ5V6 5.6V Zener Diode", Manufacturer="Diodes Inc", Manu PN=SMAZ5V6-13-F, Vendor=Digi-Key, Vendor PN=SMAZ5V6-FDICT-ND, Vertex PN=6600005
D12 D13 D14: library part DS-SMB-100V-2A, "DIODE SCHOTTKY 100V 2A SMB", Current=2A, Package=SMB, Temperature="-40°C ~ 175°C", Voltage=100V, Class=Epart, Dimension="3.5 X 2.8 X 1.9 mm", Do not load=0, Height="1.9 mm", Mfg=STMicroelectronics, MfgPN=STPS2H100UY, Unit Price=0.81, Vendor=Digi-Key, VendorPN=497-11093
F1 F2 F3: "1206 high-current met-foil. 30A", Manufacturer_Name=Bourns, Mouser Part Number=652-SF-1206HH3000R-2, Datasheet Link=https://www.bourns.com/docs/Product-Datasheets/SF-1206HH-R.pdf, Geometry.Height=1.2mm, Manufacturer_Part_Number=SF-1206HH3000R-2, Mouser Price/Stock=https://www.mouser.co.uk/ProductDetail/Bourns/SF-1206HH3000R-2?qs=Imq1NPwxi749RSSbSyFccA%3D%3D
J1: library part "Header 5", "Header, 5-Pin"
J2 J3: library part "Header 8", "Header, 8-Pin"
J4 J5: library part "Header 10", "Header, 10-Pin"
L1 L2 L3: library part LL-12.5X12.5-47u-2.59A, "INDUCTOR 47UH 2.59A 81 MOHM", Current=2.59A, DC Resistance (DCR)="81 mOhm", Package=LL-12.5X12.5, Temperature="-40°C ~ 165°C", Tolerance=±20%, Class=Epart, Dimension="12.50mm x 12.50mm", Do not load=0, Height="6 mm", Mfg=Eaton, MfgPN=DRA125-470-R, Unit Price=4.36, Vendor=Digi-Key, VendorPN=283-3577
Q1 Q2 Q7 Q12 Q13 Q14 Q15 Q16 Q18 Q19: "2N7002DW Dual N-Channel FET SC-70-6", Manufacturer="Fairchild Semiconductor", Manu PN=2N7002DW, Vendor=Digi-Key, Vendor PN=2N7002DWCT-ND, Vertex PN=6500000
Q3 Q6 Q8 Q9 Q10 Q11: "MOSFET N-CH 60V 90A TO252-31", Manufaturer=Infineon, Manu PN=IPD90N06S4L03ATMA2, Vendor=Digi-Key, Vendor PN=448-IPD90N06S4L03ATMA2CT-ND
Q4 Q5 Q17: library part Si2323DS, "ZXMP6A13F 60V P-channel FET", Manufacturer=Diodes/Zetex, Manu PN=ZXMP6A13FTA, Vendor=Digi-Key, Vendor PN=ZXMP6A13FCT-ND, Vertex PN=6500003
Q20 Q21 Q22: library part QF-SOIC8-PCH-60V-3A, "MOSFET P-CH 60V 3A 8-SOIC", Current=3A, Package=SOIC8, Power="2.5W (Ta)", Temperature="-55°C ~ 175°C (TJ)", Voltage=60V, Class=Epart, Dimension="6.2 X 5.0 X 1.7 mm", Do not load=0, Height="1.7 mm", Mfg="ON Semiconductor", MfgPN=NDS9407, Rds On="150 mOhm @ 3A, 10V", Unit Price=1.55, Vendor=Digi-Key, VendorPN=NDS9407
R1: library part RES_3K32_0603_1%_1/10W, "3.32K OHM 1% 1/8W 0603", Manufacturer=Vishay, Supplier Part Number 1=541-MCT0603MC3321FP500TR-ND, Manu PN=MCT0603MC3321FP500, Supplier 1=Digikey, Vendor=Digi-Key, Vendor PN=541-MCT0603MC3321FP500TR-ND, Vertex PN=TBD
R2 R3 R4 R5 R6 R7 R8 R10 R11 R12 R13 R14 R15 R16 R17 R18 R19 R20 R21 R22 R23 R24 R25 R26 R27 R28 R30 R31 R32 R33 R34 R35 R36 R37 R38 R39 R72 R73 R75 R76: library part RES, "Resistor", Manufacturer=Yageo, Vendor=Digi-Key
  R2 R3 R6 R10 R11 R14 R15 R16 R18 R19 R20 R22 R23 R25 R26 R32 R33 R34 R35 R72 R73 R75 R76: Manu PN=RC0805FR-0710KL, Vendor PN=311-10.0KCRCT-ND, Vertex PN=6181002
  R4 R7 R8 R13 R21 R27 R28 R30 R31 R36 R39: Manu PN=RC0805FR-071KL, Vendor PN=311-1.00KCRCT-ND, Vertex PN=6180102
  R5 R12 R17 R24: Manu PN=RC0805FR-07100KL, Vendor PN=311-100KCRCT-ND, Vertex PN=6181003
  R37 R38: Manu PN=RC0805FR-0762KL, Vendor PN=311-62.0KCRCT-ND, Vertex PN=6186202
R9: library part RES1, "RES 0.1 OHM 1% 1W 2512", Manufacturer=Vishay/Dale, Manu PN=WSL2512R1000FEA, Vendor=Digi-Key, Vendor PN=WSLG-.10CT-ND, Vertex PN=6150001
R29: library part RES, "Resistor", Manufacturer="VPG Foil Resistors", Manu PN=Y40625K00000Q0R, Vendor=Digi-Key, Vendor PN=Y4062-5.0KACT-ND
R40: library part RES, "Resistor Thermal Device", Manufacturer="TE Connectivity", Supplier Part Number 1=223-1812-ND, Manu PN=NB-PTCO-164, Supplier 1=Digikey, Vendor=Digikey, Vendor PN=223-1812-ND, Vertex PN=6900005-02
R41: library part RES, "Resistor", Manufacturer="Vishay/Thin Film", Manu PN=PLT0805Z1001AST5, Vendor=Digi-Key, Vendor PN=PLT0805-1.0KACT-ND, Vertex PN=6181102
R42 R46 R50 R52 R56 R60 R62 R66 R70: library part RS-0805-9.1K-0.1%-1/4W-155C, "100 kOhms ±0.1% 0.2W, 1/5W Chip Resistor 0805 (2012 Metric)", Package=RS-0805, Power=0.25W, Temp. Coeff.=±25ppm/°C, Temperature="-55°C ~ 250°C", Tolerance=±0.1%, Class=Epart, Dimension="1.60mm x 0.80mm", Do not load=0, Height="0.46 mm", Mfg="Vishay Dale Thin Film", MfgPN=PATT0805E1003BGT1, Unit Price=0.55, Vendor=Digi-Key, VendorPN=764-1065-1-ND
R43 R53 R63 R74: library part RS-0805-1K-0.1%-1/8W-155C, "RESISTOR SMD 1K OHM 0.1% 1/8W 0805", Package=RS-0805, Power=0.125W, Temp. Coeff.=±25ppm/°C, Temperature="-55°C ~ 230°C", Tolerance=±1%, Class=Epart, Dimension="2.00mm x 1.25mm", Do not load=0, Height="0.7 mm", Mfg="Vishay / Sfernice", MfgPN=CHPHT0805K1001FGT, Vendor=Mouser, VendorPN=71-CHPHT0805K1001FGT
R44 R54 R64: library part RC_1206, "1206", Mfr="Vishay Dale Thin Film", MPN=PATT1206E1004BGT1, Part Field 1="Description Resistor in 1206 package"
R45 R55 R65: library part RS-0805-1R-1%-0.25W-155C, "RESISTOR SMD 1 OHM 1% 1/4W 0805", Package=RS-0805, Power=0.25W, Temp. Coeff.=±100ppm/°C, Temperature="-55°C ~ 155°C", Tolerance=±1%, Class=Epart, Dimension="2.00mm x 1.25mm", Do not load=0, Height="0.7 mm", Mfg="Stackpole Electronics Inc.", MfgPN=RNCP0805FTD1R00, Unit Price=0.15, Vendor=Digi-Key, VendorPN=RNCP0805FTD1R00
R47 R57 R67: library part RS-0805-10.2K-0.1%-0.25W-155C, "RESISTOR SMD 10.2K OHM 1% 1/4W 0805", Package=RS-0805, Power=0.25W, Temp. Coeff.=±50ppm/°C, Temperature="-55°C ~ 155°C", Tolerance=±1%, Class=Epart, Dimension="2.00mm x 1.25mm", Do not load=0, Height="0.7 mm", Mfg="Panasonic Electronic Components", MfgPN=ERJ-PB6B1022V, Unit Price=0.55, Vendor=Digi-Key, VendorPN=P20709TR-ND
R48 R58: library part RS-0805-475R-0.1%-0.25W-155C, "RESISTOR SMD 475 OHM 0.1% 1/10W 0805", Package=RS-0805, Power=0.25W, Temp. Coeff.=±50ppm/°C, Temperature="-55°C ~ 155°C", Tolerance=±0.1%, Class=Epart, Dimension="2.00mm x 1.25mm", Do not load=0, Height="0.7 mm", Mfg="Panasonic Electronic Components", MfgPN=ERJ-PB6B4750V, Unit Price=0.55, Vendor=Digi-Key, VendorPN=P20557
R49 R59 R69: library part RS-0805-1.5K-0.1%-1/4W-155C, "49.9 Ohms ±0.1% 0.15W Chip Resistor 0603 (1608 Metric) Anti-Sulfur, Automotive AEC-Q200, Moisture Resistant Thin Film", Package=RS-0805, Power=0.250W, Temp. Coeff.=±25ppm/°C, Temperature="-55°C ~ 255°C", Tolerance=±0.1%, Class=Epart, Dimension="2.00mm x 1.25mm", Do not load=0, Height="0.46 mm", Mfg="Vishay Dale Thin Film", MfgPN=PATT0603E49R9BGT1, Vendor=Digi-Key, VendorPN=764-1019-1-ND
R51 R61 R71: library part RS-0805-49.9R-0.25%-0.25W-155C, "RESISTOR SMD 49.9 OHM 0.1% 1/25W 0805", Package=RS-0603, Power=0.25W, Temp. Coeff.=±25ppm/°C, Temperature="-55°C ~ 155°C", Tolerance=±0.1%, Class=Epart, Dimension="1.60mm x 0.80mm", Do not load=0, Height="0.5 mm", Mfg="KOA Speer Electronics, Inc.", MfgPN=RS73G2ATTD49R9C, Unit Price=0.113, Vendor=Digi-Key, VendorPN=2019-RS73G2ATTD49R9CTR-ND
R68: library part RS-0805-475R-0.1%-0.25W-155C, "RESISTOR SMD 475 OHM 0.1% 1/10W 0805", Package=RS-0805, Class=Epart, Dimension="2.00mm x 1.25mm", Do not load=YES, Height="0.7 mm"
RA1 RA2 RA3 RA5: library part 742x083, "742 4-Isolated 50V (0603x4) Resistor Array", Manufacturer="CTS Resistor Products", Vendor=Digi-Key
  RA1: Manu PN=742C083102JP, Vendor PN=742C083102JPCT-ND, Vertex PN=6108102
  RA2 RA3 RA5: Manu PN=742C083103JP, Vendor PN=742C083103JPCT-ND, Vertex PN=6108103
Rs1 Rs2 Rs3: library part RS-1206-0.02R-1%-1W-155C, "RESISTOR SMD 0.02 OHM 1% 1W 1206", Package=RS-1206, Power=1W, Temp. Coeff.=±75ppm/°C, Temperature="-55°C ~ 155°C", Tolerance=±1%, Class=Epart, Dimension="1.60mm x 3.20mm", Do not load=0, Height=0.6, Mfg="Panasonic Electronic Components", MfgPN=ERJ-8CWFR020V, Unit Price=1.04, Vendor=Digi-Key, VendorPN=P0.02BV
TP1: library part TP_1, "Test  Point", Package="Through hole", Num Connections=1, Number=PMT104887, RoHS=0, Subtype="Test Loop"
U1: "CAN Transceiver, 3V3", Manufacturer=TI, Operating Temperature Range="'-55C to 175C", MPN=SN65HVD233HD, Vendor=DigiKey, Vendor PN=296-28288-5-ND, Vertex PN=TBD
U2: library part ADR421, "ADR423 3.0V Voltage Reference", Manufacturer="Analog Devices Inc", Manu PN=ADR423ARZ, Vendor=Digi-Key, Vendor PN=ADR423ARZ-ND, Vertex PN=6400002
U3: "MCP130 Open Drain SVS with Internal Pull-up", Manufacturer="Microchip Technology", Manu PN=MCP130T-300I/TT, Vendor=Digi-Key, Vendor PN=MCP130T-300I/TTCT-ND, Vertex PN=6400009
U4 U6 U7 U9: "FLASH - NOR Memory IC 128Mbit SPI - Quad I/O, QPI 133 MHz 8-SOIC", Manufacturer="Infineon Technologies", Supplier Part Number 1=448-S25FL128LAGMFM010-ND, ComponentLink1Description="New link", Manu PN=S25FL128LAGMFM010, Supplier 1=Digikey, Vendor=Digi-Key, Vendor PN=448-S25FL128LAGMFM010-ND, Vertex PN=TBD
U5: Manufacturer="Microchip Technology", Manu PN=DSPIC33FJ128MC706A-I/PT, Vendor=Digi-Key, Vendor PN=DSPIC33FJ128MC706A-I/PT-ND, Vertex PN=6400000
U8: "DS2431Q+ 1-Wire 1kbit EEPROM", Manufacturer="Maxim Integrated", Manu PN=DS2431Q+T&R, Vendor=Digi-Key, Vendor PN=DS2431Q+T&RCT-ND, Vertex PN=6400032
U10 U11 U12: "IR2183S Dual High/Low Side FET Driver", Manufacturer="International Rectifier", Manu PN=IR2183STRPBF, Vendor=Digi-Key, Vendor PN=IR2183SPBFCT-ND, Vertex PN=6400005
U13: "OP296 Micropower Op Amp", Manufacturer="Analog Devices Inc", Manu PN=OP296GSZ, Vendor=Digi-Key, Vendor PN=OP296GSZ-ND, Vertex PN=6400010
U14: "SN74LVC1G126DBV Tri-state Buffer (Non-Inverting OE)", Manufacturer="Texas Instruments", Manu PN=SN74LVC1G126DBVR, Vendor=Digi-Key, Vendor PN=296-11605-1-ND, Vertex PN=6400024
U15 U17: "SN74LVC1T45 One Channel Level Shifter/Transceiver", Manufacturer="Texas Instruments", Manu PN=74LVC1T45W6-7, Vendor=Digi-Key, Vendor PN=74LVC1T45W6-7DICT-ND, Vertex PN=6400001-01
U16: "ADXL206 5g High Temperature Accelerometer", Manufacturer="Analog Devices Inc.", Manu PN=ADXL206HDZ, Vendor=Digi-Key, Vendor PN=ADXL206HDZ-ND, Vertex PN=6900007
U18 U19 U20: library part UP-SREG-CFP8-Buck-ADJ-TPS40200, "IC REG CTRLR BUCK 8CFP", Package=CFP-8, Supplier Part Number 1=296-28291-5-ND, Temperature="-55°C ~ 210°C (TA)", Voltage Input="5.5 V ~ 52 V", Voltage Output=Adjustive, Class=Epart, Dimension="24.7 X 7.3 X 2.0", Do not load=0, Height="2.0 mm", Mfg="Texas Instruments", MfgPN=TPS40200SHKJ, Supplier 1=Digi-Key, Topology=Buck, Unit Price=140.54, Vendor=Digi-Key, VendorPN=296-28291
X1: library part ECS-3951C, "ECS-3951C 5V Oscillator", Manufacturer="ECS Inc", Manu PN=ECS-3953M-200-AU-TR, Vendor=Digi-Key, Vendor PN=XC1447TR-ND, Vertex PN=6400011-01

## Free pads (board coordinates)
  round 25.4 smd: 1T(1135,115) 2T(45,115)
  round 25.4 smd far side: 1T(1135,115) 2T(45,115)
  round 60 hole 30: 26(180,850) 27(390,850) 28(229,5734) 28(250,850) 29(111,862.68) 29(134,5812) 30(614,5442) 32(740,850) 32(803,5429) 34(888,858) 35(320,850) 35(330,5410) 37(670,850) 37(692,5440) 38(672,5774) 38(1102,617) 39(1115,507) 40(839,5624) 40(953,763) 41(1111,692) 42(542,5430) 44(1106,435) 44(1125,5412) 45(157,5560) 46(1037,5984) 47(1033,6140) 48(114,6378) 49(113,6457) 50(109,6543) 50(148,7298) 51(762,5625) 52(82,6317) 53(95,6244) ""(640,231)

## Via types
v1: diameter 35, hole 20, TopLayer to BottomLayer, 210 vias
v2: diameter 50, hole 28, TopLayer to BottomLayer, 35 vias

## Nets (pads, with @x,y where several pads share a name; then routed paths per layer and width w, separated by ;. In a path a pad name is that pad's centre, name@x,y a point inside that pad or via, vN(x,y) a via of type N, cw(c..) or ccw(c..) an arc to the next point about the centre after c; other vN are vias at no path point)
1: C15.1 J4.4 Q3.3 Q6.2 R2.1 U10.6 | length 907.1
  TopLayer w10: Q6.2@356.6,9205.4 349.24,9212.76 Q6.2@363.97,9212.76 ; Q3.3@565.61,9026.39 586.41,9026.39 Q3.3@605.03,9007.76 ; 663,9169 837,9169 838,9170 867,9141 867,9117 ; 727,9154 830,9154 867,9117 ; U10.6@867,9067 867,9117
  TopLayer w30: Q6.2@363.97,9212.76 375.78,9212.76 474.95,9113.59 474.95,9094.05 561.24,9007.76 Q3.3@605.03,9007.76 568.97,9007.76 557.98,9018.75
1-WIRE: pad.51 R74.1 U5.29 U8.2 | length 733.9
  TopLayer w10: U8.2@529.09,5619.13 529.09,5624.05 550.15,5645.11 584.64,5645.11 596.75,5633 v1(638,5633) ; U5.29@533.43,5950 533.43,5917 559.06,5891.37 561.99,5888.44 635.47,5879.54 638.71,5879.15 702.58,5815.27 711.85,5787.27 cw(c672,5774) 712.13,5786.4 pad.51@762,5625 pad.51@761.5,5626.5 ; R74.1@633.09,5593.08 638,5597.98 v1@638,5628.09
  BottomLayer w10: v1(638,5633) 639,5632 755,5632 pad.51@762,5625
1H: U5.61 U10.1 | length 4311.8
  TopLayer w10: U5.61@356.26,6393.07 356.26,6347.26 349,6340 260.05,6340 224.06,6373.49 223.93,6373.61 221,6376.54 221,6662.03 353.97,6795 872,6795 902,6825 v1(905,6825) ; v1(902,6703) 968.88,6703 978.88,6693 1039,6693 1181,6835 1181,9083 1142,9122 1020,9122 967,9175 U10.1@967,9286
  BottomLayer w10: v1(902,6703) 903.5,6704.5 903.5,6823.5 v1(905,6825)
1L: RA3.7 U5.60 U10.2 | length 3913.3
  TopLayer w10: U5.60@375.95,6393.07 375.95,6427.05 356,6447 356,6718 382,6744 985,6744 v1(1075,6834) ; U10.2@917,9286 917,9190 1002,9105 1088,9105 1164,9029 1164,8792.86 1150,8792.86 ; RA3.7@1044,8725.5 1045.64,8725.5 1050.48,8730.34 1050.48,8744.48 1091,8785 1120.33,8785 1128.18,8792.86 1150,8792.86 ; v1(1079,7528) 1095,7544 v1(1095,7763.52) ; v1(1138.85,8487.74) 1138.85,8494.51 1150,8505.66 1150,8792.86
  BottomLayer w10: v1(1075,6834) 1075,6916.13 1098,6939.13 1098,7502.24 1079,7521.24 v1(1079,7528) ; v1(1095,7763.52) 1144.5,7813.02 1144.5,8348.76 1138,8355.26 1138,8486.89 v1(1138.85,8487.74)
2: C17.1 J4.7 Q8.3 Q9.2 R6.1 U11.6 | length 342.8
  TopLayer w30: Q9.2@355.98,8588 367.8,8588 466.97,8488.83 466.97,8488.03 549.61,8405.39 604.11,8405.39 Q8.3@610.5,8399
  BottomLayer w10: v2(137,8694) v2@137,8703.57
2H: U5.63 U11.1 | length 4226.6
  TopLayer w10: v1(269,6471) 269.48,6470.52 294.48,6470.52 316.58,6448.42 316.58,6393.39 U5.63@316.89,6393.07 ; v1(963,8614) 963,8620.76 979,8636.76 U11.1@979,8693
  MidLayer1 w10: v1(269,6471) 275.76,6471 282.32,6477.56 463.88,6477.56 639,6302.44 639,6121.13 584.37,6066.5 539.78,6066.5 495.78,6110.5 468.72,6110.5 456.22,6123 408.28,6123 393.93,6108.65 393.93,6100.36 396.35,6081.28 413.63,6064 438.07,6064 442.47,6065.72 450.5,6065.72 459.27,6074.49 483.71,6074.49 505.1,6053.1 505.1,6013.14 528.23,5990 574.72,5990 851,6266.28 851,6449.22 934.5,6532.72 934.5,6883.78 919.5,6898.78 919.5,7234.83 944.6,7259.93 944.6,7425.82 987.5,7468.72 987.5,8035.23 948.5,8074.23 948.5,8333.48 963,8347.98 v1(963,8614)
2L: RA3.5 U5.62 U11.2 | length 3377.7
  TopLayer w10: U5.62@336.58,6393.07 336.58,6724.42 336.53,6724.47 336.53,6725.33 336.53,6729.48 368.06,6761 940.5,6761 1060,6880.5 1114.83,6880.5 1162,6927.67 1162,8167 1113.5,8215.5 1102.78,8215.5 1056,8262.28 1056,8508.97 1033.97,8531 924.86,8531 919,8536.86 919,8649.22 921,8651.22 921,8685 U11.2@929,8693 929,8726 948,8745 997,8745 1009,8733 1009,8705 1020,8694 RA3.5@1044,8694
2V5: C11.1 U5.56 | length 184.7
  TopLayer w10: C11.1@416,6549 416,6478 437.69,6478 454.69,6461 U5.56@454.69,6393.07